# Altium PCB PCB_1.PcbDoc
Units mil, origin at the board's own origin, x right, y up, seen from the top; angles counter-clockwise.
Board outline 1510 x 2000 mil, 2 copper layers (Top Layer, Bottom Layer); 10 components, 8 nets, 27 pads, 8 vias.
Unrouted connection lines stored in the file: 1.
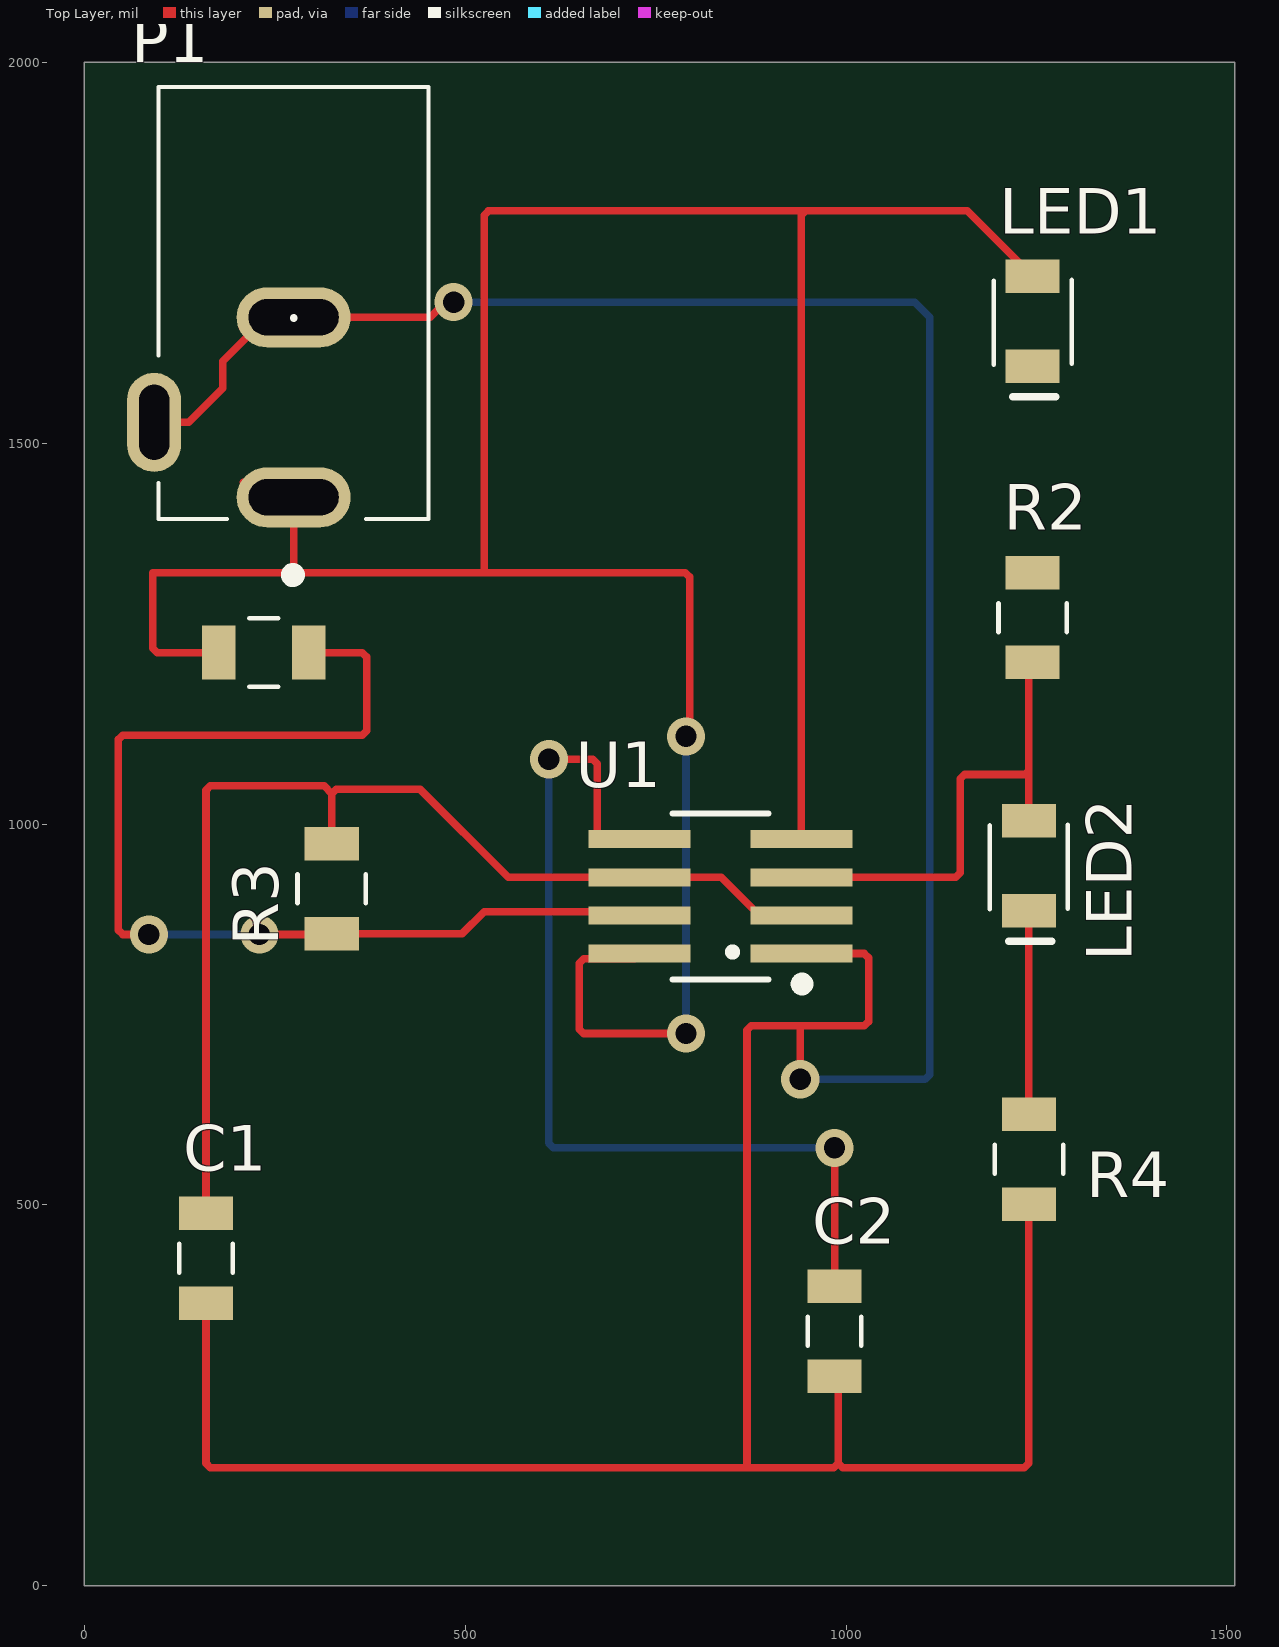
[diagram p0: Top Layer view]
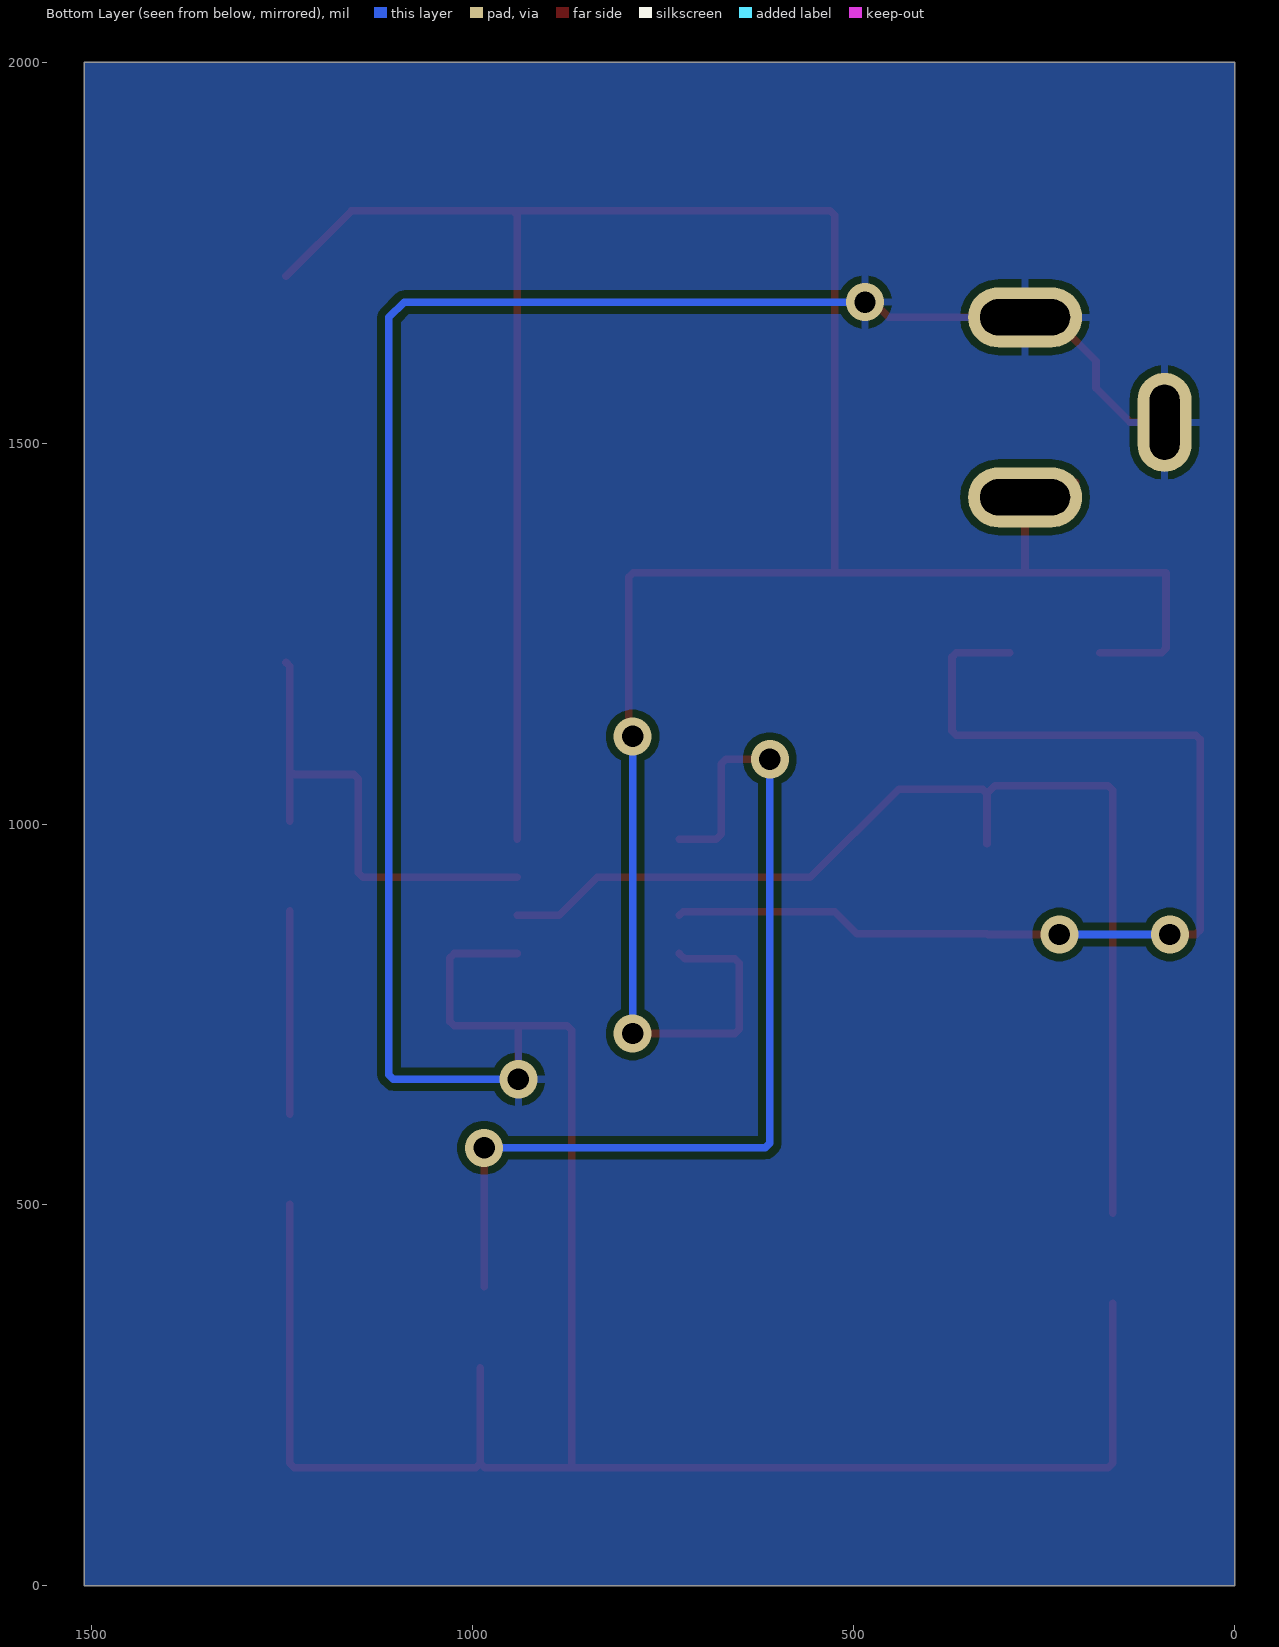
[diagram p1: Bottom Layer view, seen from below]
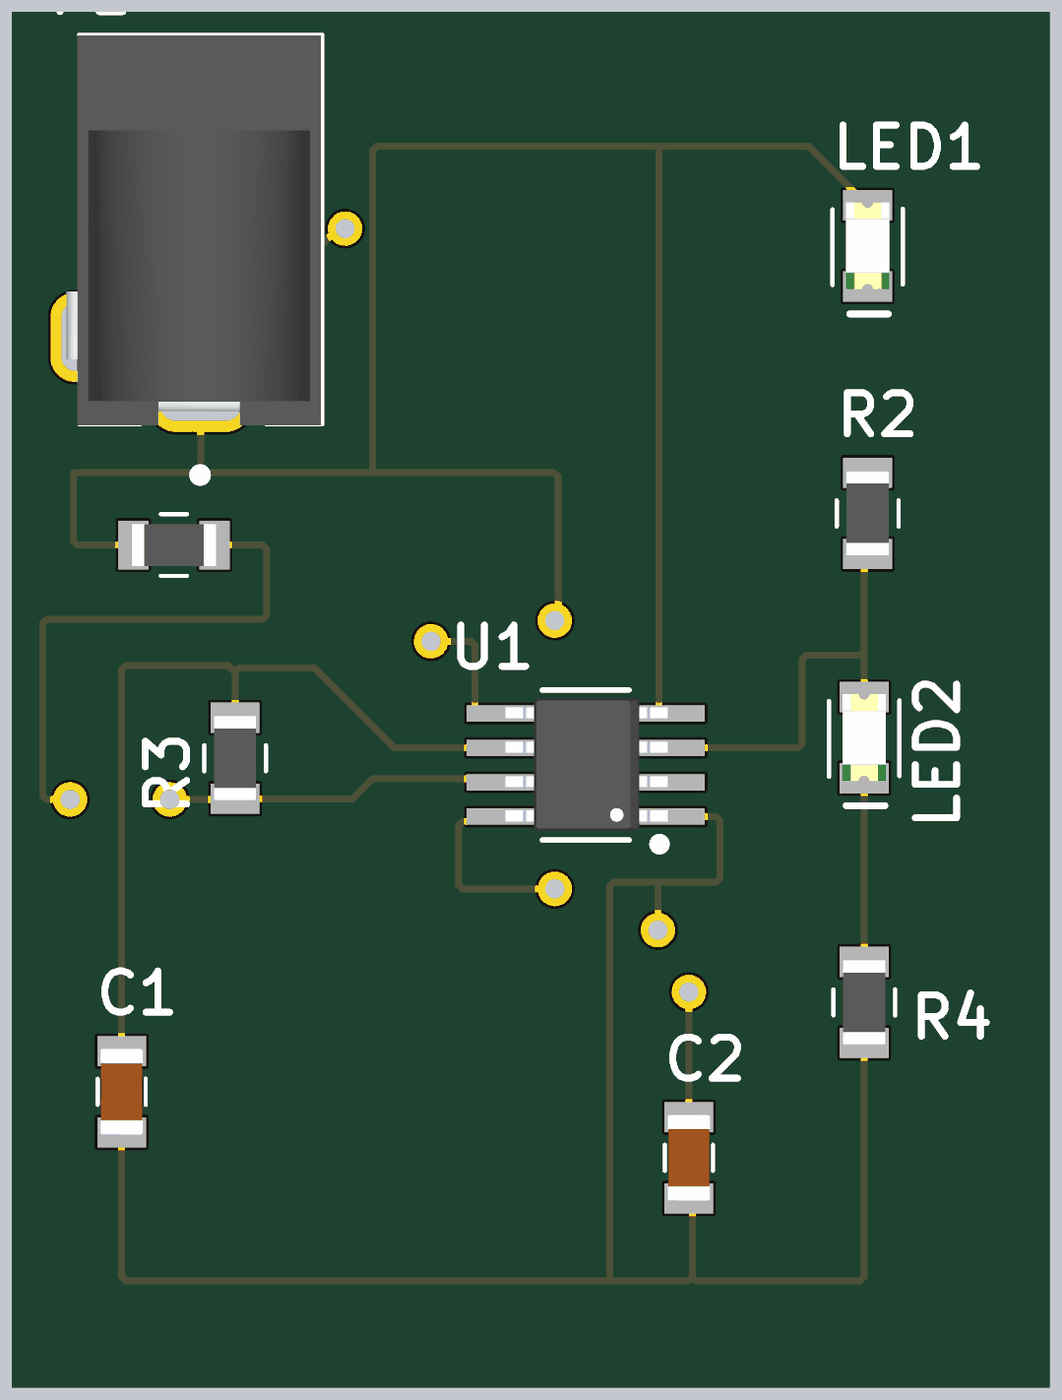
[diagram p2: 3D render of the assembled board from above, using the file's embedded part models]

## Layer stack, top to bottom
Top Solder: solder mask 0.4, Solder Resist, Dk 3.5
Top Layer: signal copper 1.4
Dielectric 1: dielectric 12.6, FR-4, Dk 4.8
Bottom Layer: signal copper 1.4
Bottom Solder: solder mask 0.4, Solder Resist, Dk 3.5

## Board outline
0,0 1510,0 1510,2000 0,2000

## Design rules (kind name [scope] priority, off if disabled: settings)
Clearance [All] p1: gap=10 ignorepadtopadclearanceinfootprint=FALSE except(0: Arc-Hole Track-Hole SMDPad-Hole THPad-Hole Via-Hole Fill-Hole Poly-Hole Region-Hole Text-Hole)
PolygonConnect [All] p1: connectstyle=Relief reliefconductorwidth=10 reliefentries=4 polygonreliefangle="90 Angle" airgapwidth=10
RoutingVias [All] p1: holewidth=28 width=50 viastyle="Through Hole" minholewidth=28 minwidth=50 maxholewidth=28 maxwidth=50
SolderMaskExpansion [All] p1: expansion=4 istentingtop=FALSE
Width [All] p1: maxlimit=10 minlimit=10 preferedwidth=10
30 further rules are at their usual default settings.

## Components (designator, comment, footprint, x,y, rotation, side; value= is the part's Value field where it differs from the comment)
C1 "22uF" 1206_Passive_Capacitor 160,430 r90 top
C2 "1uF" 1206_Passive_Capacitor 985,334 r90 top
LED1 "Blue" LED_1206 1245,1660 r270 top
LED2 "Green" LED_1206 1240,945 r270 top
P1 "Power Jack" Power_Jack 275,1428.78 r90 top value="CONN PWR JACK 2X5.5MM SOLDER"
R1 "1k" 1206_Passive_Resitor 236,1225 r0 top value="1K Ohm"
R2 "100Ohm" 1206_Passive_Resitor 1245,1271 r90 top
R3 "100KOhm" 1206_Passive_Resitor 325,915 r90 top
R4 "100Ohm" 1206_Passive_Resitor 1240,560 r90 top
U1 "NE555DR" TS555IDTTR 835,905 r180 top

## Footprints (in the part's own frame and the unit in brackets; to place one, negate y for a bottom-side part, rotate by r counter-clockwise, add the part's x,y. Pads: shape width x height; smd on the part's side, far side on the other; paste and mask are expansions set on the pad)
1206_Passive_Capacitor [mil]
  rect 44x71 smd: 1(-59,0) 2(59,0)
  silkscreen extent -19,-35 19,35, body extent -63,-31 63,32, height 50
1206_Passive_Resitor [mil]
  rect 44x71 smd: 1(-59,0) 2(59,0)
  silkscreen extent -19,-45 19,45, body extent -61,-31 61,31, height 26
LED_1206 [mil]
  rect 44x71 smd: 1(-59,0) 2(59,0)
  silkscreen extent -54,-51 99,51, body extent -63,-31 63,31, height 28
Power_Jack [mm]
  oval 2x3.8 hole 1.2 slot 3 at 90 deg: 1(0,0) 2(6,0)
  oval 3.3x1.8 hole 1 slot 2.5 at 0 deg: 3(2.5,4.65)
  silkscreen extent -2.79,-4.5 13.68,4.5, body extent -0.76,-4.45 13.64,4.95, height 11.49
TS555IDTTR [mm] "IC OSC Single Timer 2.7MHz 8SOIC"
  rect 3.4x0.6 smd: 1(-2.7,1.905) 2(-2.7,0.635) 3(-2.7,-0.635) 4(-2.7,-1.905) 5(2.7,-1.905) 6(2.7,-0.635) 7(2.7,0.635) 8(2.7,1.905)
  silkscreen extent -2.85,-2.77 1.6,3.05, body extent -3.03,-2.48 2.96,2.43, height 1.75

## Part data
C1: library part C_22uF_1206, "22uF ±10% 25V X5R 1206 Multilayer Ceramic Capacitors MLCC - SMD/SMT RoHS", LCSC Part#=C12891, MFR Part #=CL31A226KAHNNNE, Datasheet=https://datasheet.lcsc.com/lcsc/1811031514_Samsung-Electro-Mechanics-CL31A226KAHNNNE_C12891.pdf, Type=basic
C2: library part C_1uF_1206, "MULTILAYER CERAMIC CAPACITORS MLCC - SMD/SMT 1UF 50V 1206 ROHS", LCSC Part#=C1848, MFR Part #=CL31B105KBHNNNE, Digikey Link=https://www.digikey.com/product-detail/en/C1206C105M4RACTU/399-8150-1-ND/3471873/?itemSeq=304982366, Type=Basic
LED1: library part LED_BLUE_1206, "blue 1206  Light Emitting Diodes (LED) ROHS", LCSC Part#=C130717, MFR Part #=NCD1206B1, Datasheet=https://datasheet.lcsc.com/lcsc/2008201033_Foshan-NationStar-Optoelectronics-NCD1206B1_C130717.pdf, Type=Extended
LED2: library part LED_GREEN_1206, "Green 513~528nm 1206 Light Emitting Diodes (LED) RoHS", LCSC Part#=C434439, MFR Part #=SZYY1206G, Datasheet=https://datasheet.lcsc.com/lcsc/2006301532_Yongyu-Photoelectric-SZYY1206G_C434439.pdf, Type=Extended
P1: library part "P_Power Jack", "Power Barrel Connector Jack 2.10mm ID (0.083\"), 5.50mm OD (0.217\") Through Hole, Right Angle", LCSC Part#=C136744, MFR Part #=PJ-102A, Digikey Link=https://www.digikey.com/product-detail/en/PJ-102A/CP-102A-ND/275425/?itemSeq=304982367, Type=Extended
R1: library part R_1K_1206, "CHIP RESISTOR - SURFACE MOUNT 1KOHMS ±1% 1/4W 1206 ROHS", LCSC Part#=C4410, MFR Part #=RNCP1206FTD1K00CT, Digikey Link=https://www.digikey.com/product-detail/en/RNCP1206FTD1K00/RNCP1206FTD1K00CT-ND/2240675/?itemSeq=304982373, Type=Basic
R2 R4: library part R_100Ohm_1206, "100Ω ±1% 0.25W ±100ppm/℃ 1206 Chip Resistor - Surface Mount RoHS", LCSC Part#=C17901, MFR Part #=1206W4F1000T5E, Datasheet=https://datasheet.lcsc.com/lcsc/2206010145_UNI-ROYAL-Uniroyal-Elec-1206W4F1000T5E_C17901.pdf, Type=Basic
R3: library part R_100KOhm_1206, "100kΩ ±1% 0.25W ±100ppm/℃ 1206 Chip Resistor - Surface Mount RoHS", LCSC Part#=C17900, MFR Part #=1206W4F1003T5E, Datasheet=https://datasheet.lcsc.com/lcsc/1810301421_UNI-ROYAL-Uniroyal-Elec-1206W4F1003T5E_C17900.pdf, Type=Basic
U1: library part U_555_Slow, "555 Timer SOIC-8_150MIL ROHS 150ns Rise Time", LCSC Part#=C7593, Digikey Link=https://www.digikey.com/product-detail/en/texas-instruments/NE555DR/296-6501-1-ND/372490, MFR Part #=NE555DR, Type=Basic

## Via types
v1: diameter 50, hole 28, Top Layer to Bottom Layer, 8 vias

## Nets (pads, with @x,y where several pads share a name; then routed paths per layer and width w, separated by ;. In a path a pad name is that pad's centre, name@x,y a point inside that pad or via, vN(x,y) a via of type N, cw(c..) or ccw(c..) an arc to the next point about the centre after c; other vN are vias at no path point)
GND: C1.1 C2.1 P1.2 P1.3 R4.1 U1.1 | length 5074.1
  Top Layer w10: P1.3 137.2,1527.2 181.81,1571.81 181.81,1607.24 239.57,1665 P1.2 454.18,1665 474.18,1685 v1(485,1685) ; C1.1 160,160.86 165.86,155 870,155 ; P1.2@207.81,1651.85 240,1684.03 P1.2@240,1685 ; v1(940,665) 940,735 ; U1.1 1024.14,830 1030,824.14 1030,740.86 1024.14,735 940,735 ; C2.1@990,286 990,160.86 ; R4.1 1240,160.86 1234.14,155 995.86,155 990,160.86 ; 870,155 984.14,155 990,160.86 ; 870,155 870,729.14 875.86,735 940,735
  Bottom Layer w10: v1(485,1685) 1090,1685 1110,1665 1110,670.86 1104.14,665 v1(940,665)
NetC1_2: C1.2 R3.2 U1.2 U1.6 | length 1480.1
  Top Layer w10: C1.2 160,1044.14 165.86,1050 315,1050 325,1040 ; R3.2 325,1040 ; U1.2 886.18,880 836.18,930 U1.6 556.74,930 440.89,1045.86 330.86,1045.86 325,1040
NetC2_2: C2.2 U1.5 | length 1279.8
  Top Layer w10: v1(610,1085) 667.72,1085 673.58,1079.14 673.58,986.81 680.39,980 U1.5 ; C2.2 v1(985,575)
  Bottom Layer w10: v1(610,1085) 610,580.86 615.86,575 v1(985,575)
NetLED1_2: LED1.2 R2.2
NetLED2_1: LED2.1 R2.1 U1.3 | length 639
  Top Layer w10: U1.3 1144.14,930 1150,935.86 1150,1059.14 1155.86,1065 1235,1065 1240,1070 ; LED2.1 1240,1070 ; R2.1 1240,1207 1240,1070
NetLED2_2: LED2.2 R4.2 | length 267
  Top Layer w10: R4.2 LED2.2
NetR1_2: R1.2 R3.1 U1.7 | length 1456.2
  Top Layer w10: v1(85,855) 50.86,855 45,860.86 45,1110.84 50.86,1116.7 365,1116.7 370.86,1122.56 370.86,1219.14 365,1225 R1.2 ; v1(230,855) 324,855 R3.1 496,856 525,885 723.7,885 U1.7
  Bottom Layer w10: v1(85,855) v1(230,855)
VCC: LED1.1 P1.1 R1.1 U1.4 U1.8 | length 3994.7
  Top Layer w10: R1.1 95.86,1225 90,1230.86 90,1330 275,1330 ; P1.1@208.78,1448.78 P1.1@240,1448.78 ; P1.1 275,1330 ; U1.8 721.89,823.19 655.86,823.19 650,817.33 650,730.86 655.86,725 v1(790,725) ; v1(790,1115) 795,1120 795,1324.14 789.14,1330 525,1330 ; U1.4 941.3,1799.14 947.16,1805 ; LED1.1 1159,1805 947.16,1805 ; 275,1330 525,1330 ; 525,1330 525,1799.14 530.86,1805 947.16,1805
  Bottom Layer w10: v1(790,725) v1(790,1115)

## Polygon pours and split planes (outlines as drawn)
GND on Bottom Layer "GND_L02_P001" (solid, pour order 1): 0,0 1510,0 1510,2000 0,2000

## Silkscreen, mask and mechanical layers (free items; w line width, h text height)
Mechanical 1:
  the board outline again, w47.24